# Altium PCB Mircod_TEST.PcbDoc
Units mm, origin at the board's own origin, x right, y up, seen from the top; angles counter-clockwise.
Board outline 23.05 x 42.5 mm, 2 copper layers (Top Layer, Bottom Layer); 47 components, 40 nets, 201 pads, 43 vias.
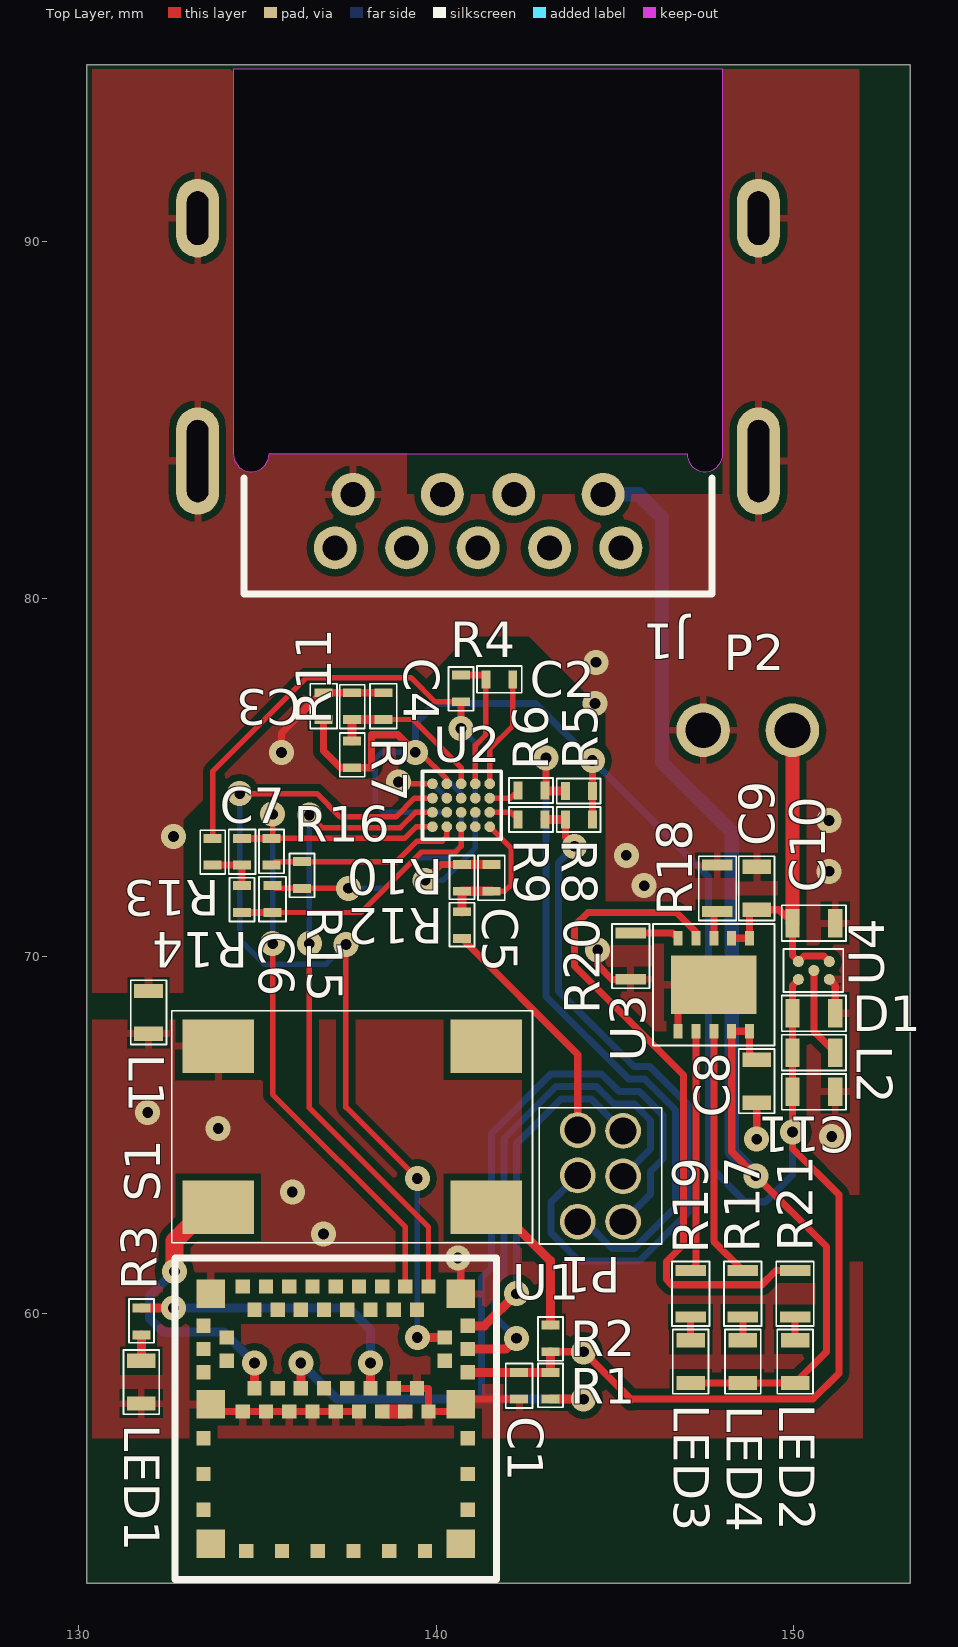
[diagram p0: Top Layer view]
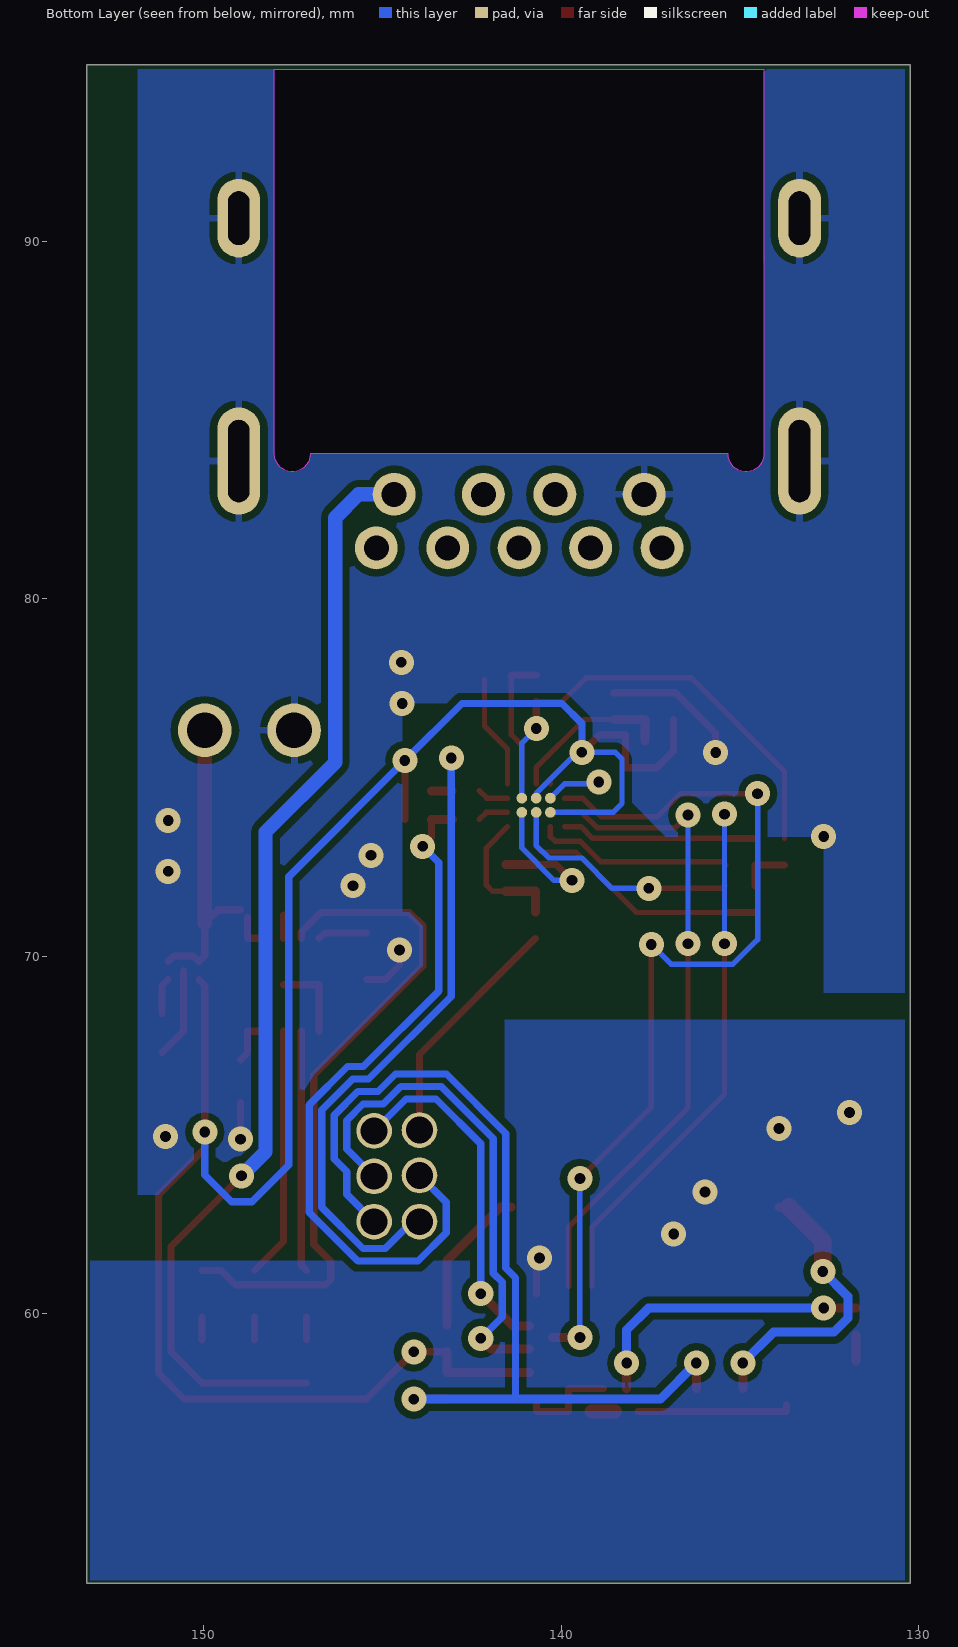
[diagram p1: Bottom Layer view, seen from below]

## Layer stack, top to bottom
Top Solder: solder mask 0.0102, Solder Resist, Dk 3.5
Top Layer: signal copper 0.0356
Dielectric 1: dielectric 0.32, FR-4, Dk 4.8
Bottom Layer: signal copper 0.0356
Bottom Solder: solder mask 0.0102, Solder Resist, Dk 3.5

## Board outline
130.25,94.95 153.275,94.95 153.275,52.45 130.225,52.45 130.225,94.95

## Design rules (kind name [scope] priority, off if disabled: settings)
Clearance [All] p1: gap=0.2
PolygonConnect PolygonConnect_1 [IsVia] p1: connectstyle=Direct reliefconductorwidth=0.254 reliefentries=4 polygonreliefangle="90 Angle" airgapwidth=0.254
PolygonConnect [All] p2: connectstyle=Relief reliefconductorwidth=0.2 reliefentries=4 polygonreliefangle="90 Angle" airgapwidth=0.2
RoutingVias [All] p1: holewidth=0.3 width=0.7 viastyle="Through Hole" minholewidth=0.3 minwidth=0.7 maxholewidth=0.3 maxwidth=0.7
SolderMaskExpansion [All] p1: expansion=0.102
Width [All] p1: maxlimit=0.2 minlimit=0.2 preferedwidth=0.2
29 further rules are at their usual default settings.

## Classes and differential pairs
component class L1: C1 LED1 R1 R2 R3 S1 U1
component class L2: C2 C3 C4 C5 C6 C7 R4 R5 R6 R7 R8 R9 R10 R11 R12 R13 R14 R15 R16 U2
component class L3: C8 C9 LED2 LED3 LED4 R17 R18 R19 R20 R21 U3
component class L4: C10 C11 L2 U4
component class Mircod_TEST_LIST_MAIN: D1 J1 L1 P1 P2

## Components (designator, comment, footprint, x,y, rotation, side; value= is the part's Value field where it differs from the comment)
C1 "0.1uF" Csmd_0402 142.325,57.6 r90 top
C2 "3.3uF" Csmd_0402 142.145,77.748 r180 top
C3 "0.1uF" Csmd_0402 136.85,77.375 r270 top
C4 "0.1uF" Csmd_0402 138.525,77.375 r270 top
C5 "1nF" Csmd_0402 141.547,71.818 r90 top
C6 "5.6nF" Csmd_0402 135.42,71.973 r270 top
C7 "5.6nF" Csmd_0402 134.57,73.298 r270 top
C8 "1uF" CSMD_0603 148.975,65.9 r90 top
C9 "1uF" CSMD_0603 148.975,72.5 r270 top
C10 "4.7uF" CSMD_0603 151.175,70.925 r180 top
C11 "10uF" CSMD_0603 151.175,66.2 r180 top
D1 "schottky diode" DSMD_0603 151.175,68.4 r180 top
J1 "692121230100" 692121230100 141.175,88.075 r180 top
L1 "max ph val" RDSMD_0603 131.95,69.025 r270 top
L2 "1uH" RDSMD_0603 149.975,67.3 r0 top
LED1 "LED" RDSMD_0603 131.75,58.675 r270 top
LED2 "LED" GDSMD_0603 150.05,58.05 r90 top
LED3 "LED" GDSMD_0603 147.125,58.05 r90 top
LED4 "LED" BDSMD_0603 148.587,58.05 r90 top
P1 "PORT" H_3X2_1_27 144.6,63.85 r180 top
P2 "Header 1x2" header-2 149.975,76.325 r180 top
R1 "1k" SMD_0402 143.2,57.6 r90 top
R2 "1k" SMD_0402 143.2,59.675 r270 top
R3 "120" SMD_0402 131.75,59.4 r90 top
R4 "10M" SMD_0402 140.695,77.873 r270 top
R5 "10M" SMD_0402 144.375,74.625 r180 top
R6 "150k" SMD_0402 143.044,74.638 r180 top
R7 "10M" SMD_0402 137.65,76.025 r270 top
R8 "10M" SMD_0402 144.375,73.825 r180 top
R9 "150k" SMD_0402 143.044,73.825 r180 top
R10 "10M" SMD_0402 140.722,71.818 r90 top
R11 "10M" SMD_0402 137.65,77.375 r270 top
R12 "300k" SMD_0402 140.722,70.493 r90 top
R13 "499k" SMD_0402 133.745,73.298 r270 top
R14 "1M" SMD_0402 134.57,71.973 r270 top
R15 "1M" SMD_0402 136.245,72.648 r270 top
R16 "1M" SMD_0402 135.395,72.548 r90 top
R17 "470" SMD_0603 148.588,61.2 r270 top
R18 "T(10k)" SMD_0603 147.875,72.55 r270 top
R19 "470" SMD_0603 147.125,61.2 r270 top
R20 "1k" SMD_0603 145.45,69.35 r90 top
R21 "470" SMD_0603 150.05,61.2 r270 top
S1 "SW" "6x6 Tact Switch" 141.4,62.975 r180 top
U1 "ISP1507" "LGA62 ISP1507" 133.189,61.051 r0 top
U2 "AD8233" CB-20-13 139.72,73.373 r0 top
U3 "MCP73833/4" "10-Lead, 3mm x 3mm DFN" 147.775,69.2 r0 top
U4 "ADP2108" CB-5-3 150.575,69.6 r270 top

## Footprints (in the part's own frame and the unit in brackets; to place one, negate y for a bottom-side part, rotate by r counter-clockwise, add the part's x,y. Pads: shape width x height; smd on the part's side, far side on the other; paste and mask are expansions set on the pad)
"6x6 Tact Switch" [mm] "KLS7-TS6604 6x6 Tact Switch Series"
  rect 2x1.5 smd mask+0.1: 1(0,0) 2(7.5,0) 3(0,-4.5) 4(7.5,-4.5)
  silkscreen extent -1.3,-5.5 8.8,1, body extent 1.05,-5.35 6.45,0.85, height 4.3
"10-Lead, 3mm x 3mm DFN" [mm] "10-Lead Plastic Dual-Flat No-Lead Package (MF) 3x3x0.9 mm Body (DFN)"
  rect 2.39x1.65 smd: 0(0,0)
  rect 0.25x0.4 smd mask+0.05: 1(1,-1.3) 2(0.5,-1.3) 3(0,-1.3) 4(-0.5,-1.3) 5(-1,-1.3) 6(-1,1.3) 7(-0.5,1.3) 8(0,1.3) 9(0.5,1.3) 10(1,1.3)
  silkscreen extent -1.7,-1.7 1.7,1.7, body extent -1.52,-1.52 1.52,1.52, height 0.9
692121230100 [mm] "USB 3.0 Type A Horizontal with Offset 1.04mm"
  round 1.2 hole 0.7: 1(-3.5,5.145) 2(-1,5.145) 3(1,5.145) 4(3.5,5.145) 5(4,6.645) 6(2,6.645) 7(0,6.645) 8(-2,6.645) 9(-4,6.645)
  oval 1.2x2.2 hole 0.6 slot 1.5 at 90 deg: Shell(-7.85,-2.585) Shell(7.85,-2.585)
  oval 1.2x3 hole 0.6 slot 2.3 at 90 deg: Shell(-7.85,4.215) Shell(7.85,4.215)
  Keep-Out Layer board cut-out: -6.85,-6.755 6.85,-6.755 6.85,4.015 6.8,4.232 6.662,4.406 6.461,4.503 6.239,4.503 6.038,4.406 5.899,4.232 5.85,4.015 5.85,4.015 -5.85,4.015 -5.9,4.232 -6.038,4.406 -6.239,4.503 -6.461,4.503 -6.662,4.406 -6.801,4.232 -6.85,4.015 -6.85,4.015 -6.85,4.015
  silkscreen extent -6.55,4.68 6.55,7.93, body extent -8,-7.93 8,7.94, height 4.63
BDSMD_0603 [mm] "FOR DIODE"
  rect 0.4x0.8 smd mask+0.05: 1(0,0) 2(1.2,0)
  silkscreen extent -0.3,-0.5 1.5,0.5, body extent -0.22,-0.42 1.42,0.42, height 0.9
CB-5-3 [mm] "5-Ball Wafer Level Chip Scale Package [WLCSP]"
  round 0.31 smd mask+0.05: A1(-0.25,0.433) A2(0.25,0.433) B(0,0) C1(-0.25,-0.433) C2(0.25,-0.433)
  silkscreen extent -0.6,-0.85 0.6,0.82, body extent -0.53,-0.77 0.53,0.75, height 0.6
CB-20-13 [mm] "20-Ball, Backside-Coated, Wafer Level Chip Scale Package [WLCSP]"
  round 0.3 smd mask+0.01: A1(0.18,1.452) A2(0.58,1.452) A3(0.98,1.452) A4(1.38,1.452) A5(1.78,1.452) B1(0.18,1.052) B5(1.78,1.052) C1(0.18,0.652) C5(1.78,0.652) D1(0.18,0.252) D2(0.58,0.252) D3(0.98,0.252) D4(1.38,0.252) D5(1.78,0.252)
  round 0.3 all layers, no hole mask+0.01: B2(0.58,1.052) B3(0.98,1.052) B4(1.38,1.052) C2(0.58,0.652) C3(0.98,0.652) C4(1.38,0.652)
  silkscreen extent -0.1,-0.1 2.1,1.8, body extent -0.01,0 2.04,1.71, height 0.5
Csmd_0402 [mm] "FOR CAP"
  rect 0.25x0.5 smd mask+0.05: 1(0,0) 2(0.75,0)
  silkscreen extent -0.25,-0.38 1,0.38, body extent -0.15,-0.27 0.9,0.27, height 0.55
CSMD_0603 [mm] "FOR CAP"
  rect 0.4x0.8 smd mask+0.05: 1(0,0) 2(1.2,0)
  silkscreen extent -0.3,-0.5 1.5,0.5, body extent -0.22,-0.42 1.42,0.42, height 0.9
DSMD_0603 [mm] "FOR DIODE"
  rect 0.4x0.8 smd mask+0.05: 1(0,0) 2(1.2,0)
  silkscreen extent -0.3,-0.5 1.5,0.5, body extent -0.22,-0.42 1.42,0.43, height 0.9
GDSMD_0603 [mm] "FOR DIODE"
  rect 0.4x0.8 smd mask+0.05: 1(0,0) 2(1.2,0)
  silkscreen extent -0.3,-0.5 1.5,0.5, body extent -0.22,-0.42 1.42,0.42, height 0.9
H_3X2_1_27 [mm] "PORT"
  round 1 hole 0.75 mask+0.05: 1(-0.635,1.282) 2(-0.635,0.012) 3(-0.635,-1.258) 4(0.635,-1.282) 5(0.635,-0.012) 6(0.635,1.282)
  silkscreen extent -1.71,-1.91 1.71,1.91, body extent -0.99,-1.64 0.99,1.64, height 5
header-2 [mm]
  round 1.5 hole 1: 1(0,0) 2(2.5,0)
"LGA62 ISP1507" [mm]
  rect 0.8x0.8 smd: 1(0.5,-0.5) 7(0.5,-3.6) 25(7.5,-3.6) 31(7.5,-0.5) 52(0.5,-7.5) 59(7.5,-7.5)
  rect 0.4x0.4 smd: 2(0.3,-1.4) 3(0.95,-1.725) 4(0.3,-2.05) 5(0.95,-2.375) 6(0.3,-2.7) 8(1.4,-3.8) 9(1.725,-3.15) 10(2.05,-3.8) 11(2.375,-3.15) 12(2.7,-3.8) 13(3.025,-3.15) 14(3.35,-3.8) 15(3.675,-3.15) 16(4,-3.8) 17(4.325,-3.15) 18(4.65,-3.8) 19(4.975,-3.15) 20(5.3,-3.8) 21(5.625,-3.15) 22(5.95,-3.8) 23(6.275,-3.15) 24(6.6,-3.8) 26(7.7,-2.7) 27(7.05,-2.375) 28(7.7,-2.05) 29(7.05,-1.725) 30(7.7,-1.4) 32(6.6,-0.3) 33(6.275,-0.95) 34(5.95,-0.3) 35(5.625,-0.95) 36(5.3,-0.3) 37(4.975,-0.95) 38(4.65,-0.3) 39(4.325,-0.95) 40(4,-0.3) 41(3.675,-0.95) 42(3.35,-0.3) 43(3.025,-0.95) 44(2.7,-0.3) 45(2.375,-0.95) 46(2.05,-0.3) 47(1.725,-0.95) 48(1.4,-0.3) 49(0.3,-4.55) 50(0.3,-5.55) 51(0.3,-6.55) 53(1.5,-7.7) 54(2.5,-7.7) 55(3.5,-7.7) 56(4.5,-7.7) 57(5.5,-7.7) 58(6.5,-7.7) 60(7.7,-6.55) 61(7.7,-5.55) 62(7.7,-4.55)
  silkscreen extent -0.5,-8.5 8.5,0.5, body extent -0.05,-8.05 8.05,0.05, height 1
RDSMD_0603 [mm] "FOR DIODE"
  rect 0.4x0.8 smd mask+0.05: 1(0,0) 2(1.2,0)
  silkscreen extent -0.3,-0.5 1.5,0.5, body extent -0.22,-0.42 1.42,0.43, height 0.9
SMD_0402 [mm] "FOR RES"
  rect 0.25x0.5 smd mask+0.05: 1(0,0) 2(0.75,0)
  silkscreen extent -0.23,-0.35 1,0.35, body extent -0.12,-0.25 0.87,0.25, height 0.35
SMD_0603 [mm] "FOR RES"
  rect 0.3x0.85 smd mask+0.05: 1(0,0) 2(1.3,0)
  silkscreen extent -0.25,-0.53 1.55,0.53, body extent -0.17,-0.45 1.47,0.45, height 0.45

## Part data
C1 C2 C3 C4 C5 C6 C7 C8 C9 C10 C11: library part C_SMD, "CAPACITOR"
D1: library part DIODE
J1: "USB 3.0 Type A Receptacle WR-COM, Horizontal, THT, with Clips, with 1.04 mm Offset"
L1 L2: library part INDUCTOR
R1 R2 R3 R4 R5 R6 R7 R8 R9 R10 R11 R12 R13 R14 R15 R16 R17 R18 R19 R20 R21: library part R_SMD, "RESISTOR"
S1: library part Switch, "KLS7-TS6604 6x6 Tact Switch Series"
U1: "High Performance Bluetooth 5 Ready, NFC*  & ANT Low Energy Module with MCU & Antenna"
U2: "Low Noise,  Heart Rate Monitor for Wearable Products"
U3: "Stand-Alone Linear Li-Ion / Li-Polymer Charge  Management Controller"
U4: "Compact, 600 mA, 3 MHz,  Step-Down DC-to-DC Converter"

## Via types
v1: diameter 0.7, hole 0.3, Top Layer to Bottom Layer, 43 vias

## Nets (pads, with @x,y where several pads share a name; then routed paths per layer and width w, separated by ;. In a path a pad name is that pad's centre, name@x,y a point inside that pad or via, vN(x,y) a via of type N, cw(c..) or ccw(c..) an arc to the next point about the centre after c; other vN are vias at no path point)
3.3V: C1.2 C3.2 C11.2 D1.2 L2.1 R1.2 R2.2 R5.1 R7.2 R8.1 U1.26 U2.A2 U2.B3 U2.C2 U4.C2 | length 61.3
  Top Layer w0.15: v1(139.42,75.705) 139.55,75.705 140.3,74.955 U2.A2
  Top Layer w0.2: C3.2 136.85,75.75 137.325,75.275 R7.2 138.195,75.275 138.195,76.198 138.927,76.198 v1(139.42,75.705) ; R2.2 v1(144.125,58.925) 145.475,57.575 145.5,57.6 150.554,57.6 151.275,58.321 151.275,63.32 149.975,64.62 C11.2 L2.1 D1.2 149.975,69.183 U4.C2 ; R8.1 R5.1 v1(144.375,75.475)
  Top Layer w0.254: U1.26 R1.2@143.199,58.351 ; R1.2 R2.2
  Bottom Layer w0.15: U2.C2 138.543,74.025 138.295,74.273 138.295,75.523 138.477,75.705 v1(139.42,75.705) 139.55,75.705 140.7,74.555 U2.B3
  Bottom Layer w0.2: v1(139.42,75.705) 139.42,76.52 139.975,77.075 142.775,77.075 v1(144.375,75.475) 147.625,72.225 147.625,64.15 148.65,63.125 149.225,63.125 149.975,63.875 v1(149.975,65.075)
AGND: C3.1 C4.1 C8.1 C9.1 C10.1 C11.1 D1.1 J1.4 J1.Shell L1.1 P2.2 R11.1 R18.1 R20.1 U2.A1 U2.B2 U3.0 U3.5 U4.A2 | length 12.2
  Top Layer w0.15: v1(138.945,74.873) 138.993,74.825 U2.A1
  Top Layer w0.2: v1(135.675,75.7) 135.675,76.249 136.801,77.375 C4.1 ; v1(144.525,70.175) 144.525,69.75 144.925,69.35 R20.1 ; U3.5 146.775,69.2 U3.0 ; v1(148.975,64.875) C8.1 ; U4.A2 151.175,69.183 D1.1
  Bottom Layer w0.15: v1(138.945,74.873) 138.993,74.825 139.9,74.825 U2.B2
  other v1: 151.075,64.95 145.825,71.975 151,72.375 145.325,72.825 132.65,73.35 151,73.8 144.45,77.075 144.475,78.225
DGND: C1.1 L1.2 LED1.2 S1.4 U1.1 U1.7 U1.8 U1.10 U1.12 U1.14 U1.16 U1.18 U1.21 U1.23 U1.24 U1.25 U1.31 | length 9.9
  Top Layer w0.2: U1.7 133.689,57.251 U1.8 U1.10 U1.12 U1.14 U1.16 U1.18 ; U1.21 U1.23 139.789,57.901 U1.24 140.689,57.251 U1.25 140.689,57.6 C1.1 ; v1(140.607,61.553) 140.689,61.553 U1.31
  Bottom Layer w0.2: v1@140.607,61.55 v1(140.607,61.553)
  other v1: 136.85,62.225 135.975,63.4 133.9,65.175 131.925,65.625
FEEDBACK: R4.2 R13.1 U2.B4 | length 13.1
  Top Layer w0.15: R13.1 133.745,75.173 136.37,77.798 139.295,77.798 139.97,77.123 R4.2
  Top Layer w0.2: v1(140.695,76.373) R4.2
  Bottom Layer w0.15: v1(140.695,76.373) 141.1,75.968 U2.B4
LA: P1.6 R5.2 R6.1 | length 19.4
  Top Layer w0.2: R6.1 143.075,74.669 v1(143.075,75.55)
  Top Layer w0.254: R6.1@143.057,74.625 R5.2
  Bottom Layer w0.2: v1(143.075,75.55) 143.075,68.875 145.392,66.557 145.836,66.557 146.7,65.693 146.7,62.972 145.546,61.817 144.924,61.817 144.174,62.567 P1.6
NetC2_1: C2.1 U2.A5 | length 3.2
  Top Layer w0.15: U2.A5 141.5,75.803 142.145,76.448 C2.1
NetC2_2: C2.2 R4.1 U2.A4 | length 3.8
  Top Layer w0.15: U2.A4 141.1,75.903 141.395,76.198 C2.2
  Top Layer w0.2: R4.1 141.37,77.873 C2.2@141.395,77.848
NetC4_2: C4.2 R7.1 R11.2 U2.A3 | length 4.7
  Top Layer w0.15: C4.2 139.353,76.625 140.7,75.278 U2.A3
  Top Layer w0.254: R7.1 R11.2 C4.2
NetC5_1: C5.1 R10.1 R12.2 U2.D5 | length 3.9
  Top Layer w0.15: U2.D5 142.095,73.03 142.095,71.998 141.915,71.818 C5.1
  Top Layer w0.254: R12.2 R10.1 C5.1
NetC5_2: C5.2 R10.2 U2.C4 | length 4.8
  Top Layer w0.2: v1(139.695,72.123) 140.14,72.568 R10.2
  Top Layer w0.254: R10.2 C5.2
  Bottom Layer w0.15: v1(139.695,72.123) 140.195,72.123 141.1,73.028 U2.C4
NetC6_1: C6.1 R15.2 U2.C3 | length 6.7
  Top Layer w0.15: C6.1 135.495,71.898 R15.2 v1(137.545,71.898)
  Bottom Layer w0.15: v1(137.545,71.898) 138.57,71.898 139.42,72.748 140.345,72.748 140.7,73.103 U2.C3
NetC6_2: C6.2 R14.2 U2.D3 | length 7.4
  Top Layer w0.15: C6.2 137.895,71.223 139.59,72.918 140.54,72.918 140.7,73.078 U2.D3
  Top Layer w0.2: R14.2 C6.2
NetC7_1: C7.1 R16.2 U1.34 U2.D1 | length 20.9
  Top Layer w0.15: v1(135.425,70.35) 135.425,66.128 139.139,62.414 U1.34 ; v1(135.425,73.975) 135.425,73.328 R16.2 139.121,73.298 139.448,73.625 U2.D1
  Top Layer w0.2: C7.1 R16.2
  Bottom Layer w0.15: v1(135.425,70.35) v1(135.425,73.975)
NetC7_2: C7.2 R13.2 R14.1 | length 1.4
  Top Layer w0.2: R13.2 C7.2 R14.1
NetL2_2: L2.2 U4.B | length 2.5
  Top Layer w0.2: U4.B 150.575,67.9 L2.2
NetLED1_1: LED1.1 R3.1 | length 0.7
  Top Layer w0.254: LED1.1 R3.1
NetLED2_2: LED2.2 R21.2 | length 0.6
  Top Layer w0.2: LED2.2 R21.2
NetLED3_2: LED3.2 R19.2 | length 0.6
  Top Layer w0.2: LED3.2 R19.2
NetLED4_2: LED4.2 R17.2 | length 0.6
  Top Layer w0.2: LED4.2 R17.2
NetR2_1: R2.1 S1.1 | length 4.2
  Top Layer w0.254: S1.1 141.7,62.975 143.2,61.475 R2.1
NetR3_2: R3.2 U1.19 | length 8.3
  Top Layer w0.254: R3.2 v1(132.65,60.15) ; U1.19 v1(138.164,58.611)
  Bottom Layer w0.254: v1(132.65,60.15) 137.55,60.15 138.164,59.536 v1(138.164,58.611)
NetR6_2: R6.2 U2.B5 | length 0.9
  Top Layer w0.15: U2.B5 142.081,74.425 R6.2
NetR9_2: R9.2 U2.C5 | length 0.9
  Top Layer w0.15: U2.C5 142.094,74.025 R9.2
NetR15_1: R15.1 R16.1 U2.D2 | length 5.5
  Top Layer w0.15: R16.1 135.495,72.648 R15.1 138.896,72.648 139.466,73.218 140.17,73.218 140.3,73.348 U2.D2
NetR17_1: R17.1 U3.3 | length 7
  Top Layer w0.2: U3.3 147.775,62.012 R17.1
NetR18_2: R18.2 U3.8 | length 0.7
  Top Layer w0.2: U3.8 R18.2@147.775,71.15
NetR19_1: R19.1 U3.4 | length 6.8
  Top Layer w0.2: R19.1 147.275,61.35 U3.4
NetR20_2: R20.2 U3.6 | length 1.4
  Top Layer w0.2: R20.2 146.625,70.65 U3.6
NetR21_1: R21.1 U3.7 | length 19.2
  Top Layer w0.2: U3.7 147.275,70.679 146.729,71.225 144.25,71.225 143.875,70.85 143.875,69.725 146.925,66.675 146.925,61.929 146.45,61.454 146.45,60.946 146.596,60.8 149.116,60.8 149.516,61.2 R21.1
NetS1_2: S1.2 U1.9 | length 8.2
  Top Layer w0.254: S1.2@133.625,62.975 S1.2 ; U1.9 v1(134.914,58.614)
  Top Layer w0.5: v1(132.675,61.175) 132.675,62.025 S1.2@133.625,62.975
  Bottom Layer w0.254: v1(132.675,61.175) 131.973,60.473 131.973,59.87 132.37,59.473 134.055,59.473 v1(134.914,58.614)
NetU1_20: U1.20 U1.22 | length 0.6
  Top Layer w0.4: U1.20 U1.22
NetU1_29: U1.29 U2.B1 | length 26.1
  Top Layer w0.15: v1(134.5,74.55) 136.663,74.55 137.315,73.898 138.873,73.898 139.4,74.425 U2.B1 ; v1(137.475,70.325) 137.475,65.773 v1(139.474,63.774)
  Top Layer w0.254: v1(139.474,59.326) U1.29
  Bottom Layer w0.15: v1(134.5,74.55) 134.5,70.462 135.187,69.775 136.925,69.775 v1(137.475,70.325) ; v1(139.474,59.326) v1(139.474,63.774)
NetU1_32: U1.32 U2.C1 | length 18.4
  Top Layer w0.15: v1(136.45,70.35) 136.45,65.753 139.789,62.414 U1.32 ; v1(136.45,73.95) 136.802,73.598 138.997,73.598 139.424,74.025 U2.C1
  Bottom Layer w0.15: v1(136.45,70.35) v1(136.45,73.95)
RA: P1.5 R8.2 R9.1 | length 20.3
  Top Layer w0.2: R8.2 143.625,73.325 v1(143.875,73.075)
  Top Layer w0.254: R9.1 R8.2
  Bottom Layer w0.2: v1(143.875,73.075) 143.425,72.625 143.425,69.02 145.537,66.907 145.981,66.907 147.05,65.838 147.05,62.827 145.691,61.467 144.004,61.467 143.215,62.257 143.215,63.112 P1.5
RL: P1.4 R12.1 | length 6.7
  Top Layer w0.2: R12.1 143.965,67.25 P1.4
RST: P1.1 R1.1 U1.13 | length 26.9
  Top Layer w0.254: U1.13 v1(136.214,58.611) ; R1.1 v1(144.125,57.6)
  Bottom Layer w0.2: 141.275,57.6 141.275,60.995 141.55,61.27 141.55,65.04 143.21,66.7 144.632,66.7 145.125,66.208 145.691,66.208 146.35,65.548 146.35,64.325 146,63.975 146,63.332 P1.1
  Bottom Layer w0.254: v1(136.214,58.611) 137.225,57.6 141.275,57.6 v1(144.125,57.6)
SWCLK: P1.3 U1.30 | length 9.8
  Top Layer w0.254: U1.30 141.351,59.651 v1(142.25,60.55)
  Bottom Layer w0.2: v1(142.25,60.55) 142.25,64.75 143.5,66 144.342,66 P1.3
SWDIO: P1.2 U1.28 | length 14.4
  Top Layer w0.254: U1.28 141.951,59.001 v1(142.25,59.3)
  Bottom Layer w0.2: v1(142.25,59.3) 141.65,59.9 141.65,60.875 141.9,61.125 141.9,64.895 143.355,66.35 144.487,66.35 144.98,65.858 145.546,65.858 146,65.403 146,64.603 P1.2
VBAT: C9.2 C10.2 P2.1 U3.9 U3.10 U4.A1 U4.C1 | length 10.1
  Top Layer w0.2: U3.9 U3.10 148.775,71.1 ; C9.2 149.6,71.3 C10.2 149.975,70.017 U4.C1 150.297,70.005 150.853,70.005 U4.A1 ; P2.1 P2.1@150.175,76.525
  Top Layer w0.4: C10.2 P2.1
VUSB: C8.2 J1.1 LED2.1 LED3.1 LED4.1 U3.1 U3.2 | length 37.1
  Top Layer w0.2: LED3.1 LED2.1 150.925,58.925 150.925,61.875 v1(148.95,63.85) 148.275,64.525 U3.2 U3.1 148.775,67.3 C8.2
  Bottom Layer w0.4: J1.1 145.67,82.93 146.325,82.275 146.325,75.425 148.275,73.475 148.275,64.525 v1(148.95,63.85)
pads on no net: J1.2 J1.3 J1.5 J1.6 J1.7 J1.8 J1.9 S1.3 U1.2 U1.3 U1.4 U1.5 U1.6 U1.11 U1.15 U1.17 U1.27 U1.33 U1.35 U1.36 U1.37 U1.38 U1.39 U1.40 U1.41 U1.42 U1.43 U1.44 U1.45 U1.46 U1.47 U1.48 U1.49 U1.50 U1.51 U1.52 U1.53 U1.54 U1.55 U1.56 U1.57 U1.58 U1.59 U1.60 U1.61 U1.62 U2.D4

## Polygon pours and split planes (outlines as drawn)
DGND on Top Layer "Bottom Layer-No Net" (solid, pour order 18): 130.375,68.225 130.375,56.501 140.889,56.501 151.95,56.501 151.95,61.45 142.4,61.45 142.4,67.975 142.4,68.225 130.375,68.225
AGND on Top Layer "Bottom Layer-No Net" (solid, pour order 8): 133.442,81.43 131.65,81.43 131.65,84.999 131.65,85.075 138.745,85.075 139.175,85.075 139.175,81.43 133.442,81.43
AGND on Top Layer "Bottom Layer-No Net" (solid, pour order 2): 148.025,94.83 151.85,94.83 151.85,64.775 151.85,63.32 151.275,63.32 149.975,64.62 149.975,68.4 147.275,68.4 147.275,67.9 146.775,67.9 145.7,67.9 144.75,68.85 144.75,76.8 142.6,78.95 140.9,78.95 139.075,77.125 138.945,76.995 138.945,74.873 138.945,73.97 138.873,73.898 137.315,73.898 136.663,74.55 134.5,74.55 133.65,74.55 133.175,74.075 132.925,73.825 132.925,68.975 130.375,68.975 130.375,94.55 130.375,94.83 134.325,94.83 134.325,82.93 144.675,82.93 148.025,82.93 148.025,94.83
DGND on Bottom Layer "Bottom Layer-No Net" (solid, pour order 16): 130.375,68.225 130.375,52.525 152.8,52.525 153.175,52.525 153.175,60.025 153.175,61.475 143.2,61.475 141.575,61.475 141.575,68.25 141.575,68.225 130.375,68.225
AGND on Bottom Layer "Bottom Layer-No Net" (solid, pour order 12): 130.375,94.83 151.85,94.83 151.85,63.32 151.275,63.32 149.975,64.62 148.95,63.85 148.275,64.525 146.925,66.675 143.875,69.725 143.875,70.85 144.25,71.225 144.45,71.225 144.45,77.075 139.975,77.075 139.42,76.52 139.42,75.705 137.065,73.35 132.65,73.35 132.65,68.975 130.375,68.975 130.375,94.825

## Silkscreen, mask and mechanical layers (free items; w line width, h text height)
Mechanical 15:
  lines w0.05: 130.25,52.45 130.25,94.925 130.4,94.925 153.275,94.925 153.275,52.45 130.25,52.45

## Text inside footprints (layer, text, board x,y; h text height)
J1: Mechanical 2 "PCB Cutout Area" at 145.575,89.375 h0.81 r180